# EAGLE board eos-mc-uno (EAGLE 9.6.2)
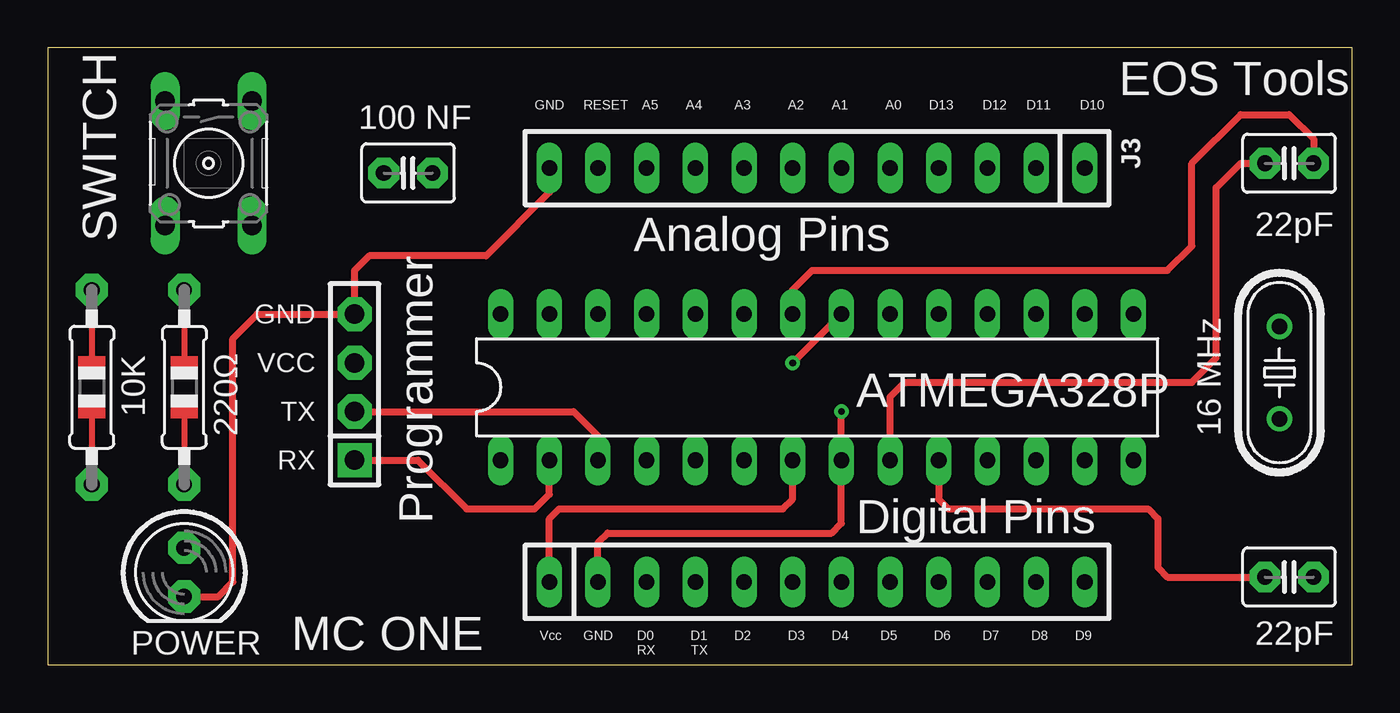
[diagram p0: board, top side]
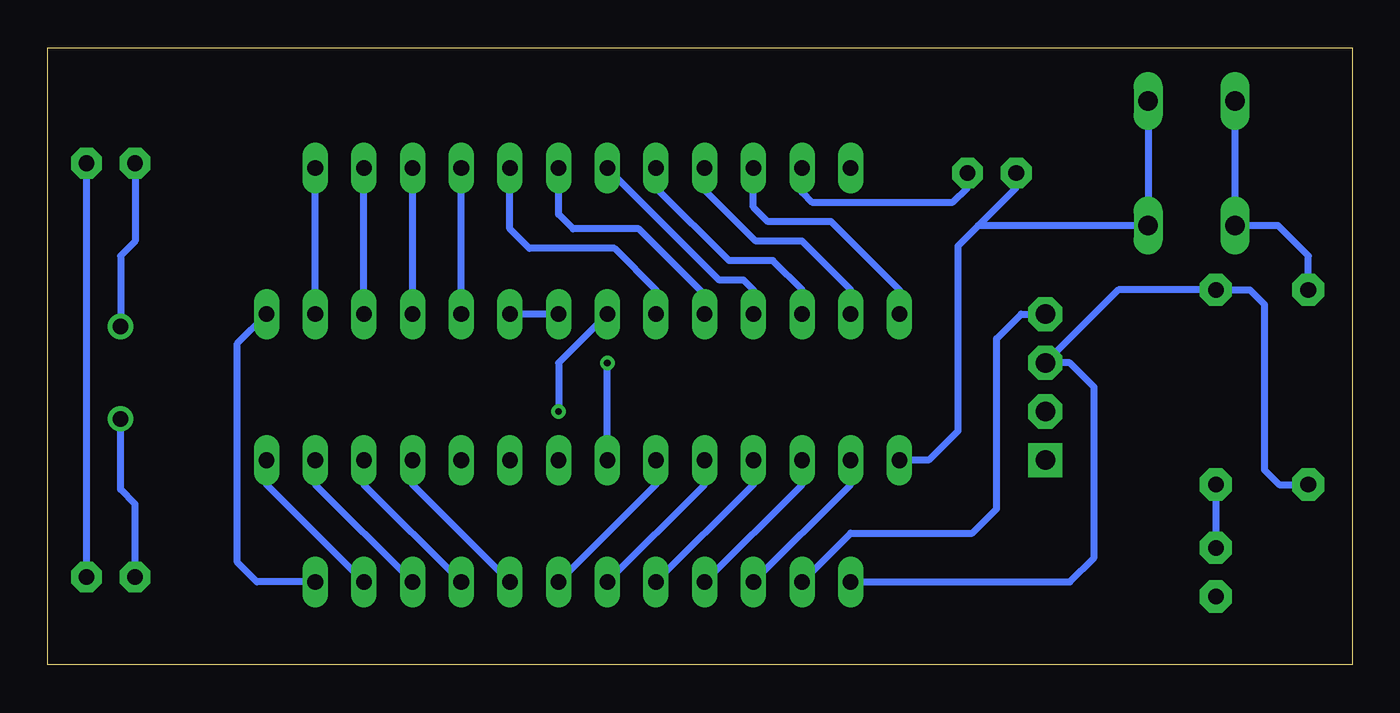
[diagram p1: board, bottom side, seen from below]

Size 68.05 x 32.18 mm. Coordinates in mm from the lower left corner, seen from the top.
Outline: 0,0 68.05,0 68.05,32.18 0,32.18 0,0
Copper layers (1*16): Top 0.035mm / dielectric 1.5mm / Bottom 0.035mm
Design rules "default": minimum track width 6mil, minimum drill 0.35mm, track to track 6mil, track to pad 6mil, pad to pad 6mil, via to via 6mil, smd to smd 6mil, copper to edge 40mil, drill to drill 6mil, minimum pad ring 10mil, minimum via ring 8mil, stop-mask expansion 4mil, vias tented up to drill 0mil, thermal gap 10mil

## Footprints (pad centres in the part's own frame; a part is rotated, then mirrored left to right if it is on the bottom)
C2.5-3 = drill 0.813 pad 1.6 octagon: 1 -1.27,0; 2 1.27,0
DIL28-3 = drill 0.813 long: 1 -16.51,-3.81; 2 -13.97,-3.81; 3 -11.43,-3.81; 4 -8.89,-3.81; 5 -6.35,-3.81; 6 -3.81,-3.81; 7 -1.27,-3.81; 8 1.27,-3.81; 9 3.81,-3.81; 10 6.35,-3.81; 11 8.89,-3.81; 12 11.43,-3.81; 13 13.97,-3.81; 14 16.51,-3.81; 15 16.51,3.81; 16 13.97,3.81; 17 11.43,3.81; 18 8.89,3.81; 19 6.35,3.81; 20 3.81,3.81; 21 1.27,3.81; 22 -1.27,3.81; 23 -3.81,3.81; 24 -6.35,3.81; 25 -8.89,3.81; 26 -11.43,3.81; 27 -13.97,3.81; 28 -16.51,3.81
SIP-100-04-40 = drill 1.016 pad 1.778 square: 1 -3.81,0 | drill 1.016 pad 1.778 octagon: 2 -1.27,0; 3 1.27,0; 4 3.81,0
SIP-100-12-32Y = drill 0.813 long: 1 -13.97,0; 2 -11.43,0; 3 -8.89,0; 4 -6.35,0; 5 -3.81,0; 6 -1.27,0; 7 1.27,0; 8 3.81,0; 9 6.35,0; 10 8.89,0; 11 11.43,0; 12 13.97,0
LED5MM = drill 0.813 pad 1.676 octagon: A -1.27,0; K 1.27,0
HC49/S = drill 0.813: 1 -2.413,0; 2 2.413,0
0805-THM = drill 0.813 pad 1.676 octagon: 1 -5.08,0; 2 5.08,0
B3F-10XX = drill 1.016 long: 1 -3.251,2.261; 2 3.251,2.261; 3 -3.251,-2.261; 4 3.251,-2.261

## Placement (x,y rotation side)
C1  22pF  [C2.5-3]  64.77,26.16 180 top
C2  22pF  [C2.5-3]  64.77,4.57 180 top
C5  100 NF  [C2.5-3]  18.8,25.65 180 top
IC1  ATMEGA328-20P  [DIL28-3]  40.13,14.48 0 top
J1  F-1X04-SIP-100-40  [SIP-100-04-40]  16,14.48 90 top
J2  F-1X12-SIP-100-32Y  [SIP-100-12-32Y]  40.13,4.32 0 top
J3  F-1X12-SIP-100-32Y  [SIP-100-12-32Y]  40.13,25.91 180 top
LED3  [LED5MM]  7.11,4.83 270 top
Q1  16 MHz  [HC49/S]  64.26,15.24 90 top
R1  10K  [0805-THM]  2.29,14.48 270 top
R5  220Ω  [0805-THM]  7.11,14.48 270 top
S1  [B3F-10XX]  8.38,26.16 270 top

## Library data of the parts
C1 C2 C5 = capacitor-wima
IC1 = atmega328
J1-J3 = con-headers-jp
LED3 R1 R5 = adafruit
Q1 = adafruit; OC_FARNELL: 1667008; OC_NEWARK: unknown
S1 = switch-omron; MPN: B3F-1000; OC_FARNELL: 176432; OC_NEWARK: 36M3542

## Nets
N$1: C1.2 IC1.9 Q1.2
N$2: C2.2 IC1.10 Q1.1
N$3: LED3.A R5.2
N$4: C1.1 C2.1 IC1.8 IC1.22 J1.4 J2.2 J3.12 LED3.K
N$5: IC1.4 J2.5
N$6: IC1.2 J1.1 J2.3
N$7: IC1.3 J1.2 J2.4
N$8: IC1.7 IC1.20 IC1.21 J1.3 J2.1 R1.2 R5.1
N$9: IC1.5 J2.6
N$10: IC1.6 J2.7
N$11: IC1.11 J2.8
N$12: IC1.12 J2.9
N$13: IC1.13 J2.10
N$14: IC1.14 J2.11
N$15: IC1.15 J2.12
N$16: IC1.16 J3.1
N$17: IC1.17 J3.2
N$18: IC1.18 J3.3
N$19: IC1.19 J3.4
N$20: IC1.23 J3.5
N$21: IC1.24 J3.6
N$22: IC1.25 J3.7
N$23: IC1.26 J3.8
N$24: IC1.27 J3.9
N$25: IC1.28 J3.10
N$26 [5V]: C5.1 J3.11
N$27: C5.2 IC1.1 S1.1 S1.2
N$29: R1.1 S1.3 S1.4

## Tracks (layer width: path | path; a pad name or v marks a point on that pad's centre or on a via)
N$1
  Top 0.356: IC1.9 43.94,13.97 44.7,14.73 59.69,14.73 60.96,16 60.96,24.89 62.23,26.16 C1.2
  Bottom 0.356: C1.2 63.5,22.1 64.26,21.34 Q1.2
N$2
  Top 0.356: IC1.10 46.48,8.64 46.99,8.13 57.4,8.13 57.91,7.62 57.91,5.08 58.42,4.57 C2.2
  Bottom 0.356: C2.2 63.5,8.38 64.26,9.14 Q1.1
N$3
  Bottom 0.356: R5.2 LED3.A
N$4  (via drill 0.35)
  Top 0.356: v41.4,13.21 IC1.8 41.4,7.37 40.89,6.86 29.21,6.86 28.7,6.35 J2.2 | LED3.K 8.89,3.56 9.65,4.32 9.65,17.02 10.92,18.29 J1.4 16,20.57 16.76,21.34 22.86,21.34 26.16,24.64 J3.12 | IC1.22 38.86,19.56 39.88,20.57 58.42,20.57 59.69,21.84 59.69,26.16 62.23,28.7 64.77,28.7 66.04,27.43 C1.1
  Bottom 0.356: J2.2 26.16,6.86 19.81,6.86 18.54,8.13 18.54,17.02 17.27,18.29 J1.4 | C1.1 C2.1 | IC1.22 41.4,15.75 v41.4,13.21
N$5
  Bottom 0.356: J2.5 31.24,9.4 IC1.4
N$6
  Top 0.356: J1.1 19.3,10.67 21.84,8.13 25.4,8.13 26.16,8.89 IC1.2
  Bottom 0.356: J2.3 26.16,9.4 IC1.2
N$7
  Top 0.356: J1.2 27.43,13.21 28.7,11.94 IC1.3
  Bottom 0.356: J2.4 28.7,9.4 IC1.3
N$8  (via drill 0.35)
  Top 0.356: v38.86,15.75 IC1.21 | J2.1 26.16,7.62 26.67,8.13 38.35,8.13 38.86,8.64 IC1.7
  Bottom 0.356: J2.1 14.73,4.32 13.46,5.59 13.46,14.48 14.73,15.75 J1.3 12.19,19.56 R5.1 5.33,19.56 4.57,18.8 4.57,10.16 3.81,9.4 R1.2 | IC1.7 v38.86,15.75 | IC1.21 IC1.20
N$9
  Bottom 0.356: J2.6 33.78,9.4 IC1.5
N$10
  Bottom 0.356: J2.7 36.32,9.4 IC1.6
N$11
  Bottom 0.356: J2.8 49.02,9.4 IC1.11
N$12
  Bottom 0.356: J2.9 51.56,9.4 IC1.12
N$13
  Bottom 0.356: J2.10 54.1,9.4 IC1.13
N$14
  Bottom 0.356: J2.11 56.64,9.4 IC1.14
N$15
  Bottom 0.356: J2.12 57.15,4.32 58.17,5.33 58.17,16.76 IC1.15
N$16
  Bottom 0.356: IC1.16 J3.1
N$17
  Bottom 0.356: IC1.17 J3.2
N$18
  Bottom 0.356: IC1.18 J3.3
N$19
  Bottom 0.356: IC1.19 J3.4
N$20
  Bottom 0.356: IC1.23 36.32,19.56 38.48,21.72 42.93,21.72 43.94,22.73 J3.5
N$21
  Bottom 0.356: IC1.24 33.78,19.3 37.21,22.73 40.64,22.73 41.4,23.5 J3.6
N$22
  Bottom 0.356: IC1.25 31.24,19.56 31.75,20.07 33.02,20.07 J3.7
N$23
  Bottom 0.356: IC1.26 28.7,19.56 30.23,21.08 32.51,21.08 36.32,24.89 J3.8
N$24
  Bottom 0.356: IC1.27 26.16,19.56 28.7,22.1 31.12,22.1 33.78,24.77 J3.9
N$25
  Bottom 0.356: IC1.28 23.62,19.56 27.18,23.11 30.48,23.11 31.24,23.88 J3.10
N$26
  Bottom 0.356: J3.11 28.7,24.64 28.19,24.13 20.83,24.13 20.07,24.89 C5.1
N$27
  Bottom 0.356: IC1.1 22.1,10.67 20.57,12.19 20.57,21.84 19.51,22.91 | S1.1 S1.2 19.51,22.91 | C5.2 17.53,24.89 19.51,22.91
N$29
  Bottom 0.356: R1.1 2.29,21.34 3.86,22.91 S1.4 S1.3

## Text on the board
tPlace: 100 NF | GND | RESET | A5 | A4 | A3 | A2 | A1 | A0 | D13 | D12 | D11 | D10 | EOS Tools | Analog Pins | SWITCH | 22pF | GND | VCC | 10K | TX | ATMEGA328P | 220Ω | 16 MHz | RX | Programmer | Digital Pins | MC ONE | Vcc | GND | D2 | D3 | D4 | D5 | D6 | D7 | D8 | D9 | 22pF | POWER | D0 / RX | D1 / TX